# Altium PCB board.PcbDoc
Units mm, origin at the board's own origin, x right, y up, seen from the top; angles counter-clockwise.
Board outline 35 x 22.5 mm, 2 copper layers (Top Layer, Bottom Layer), stack 0.97 mm thick; 43 components, 27 nets, 165 pads, 122 vias.
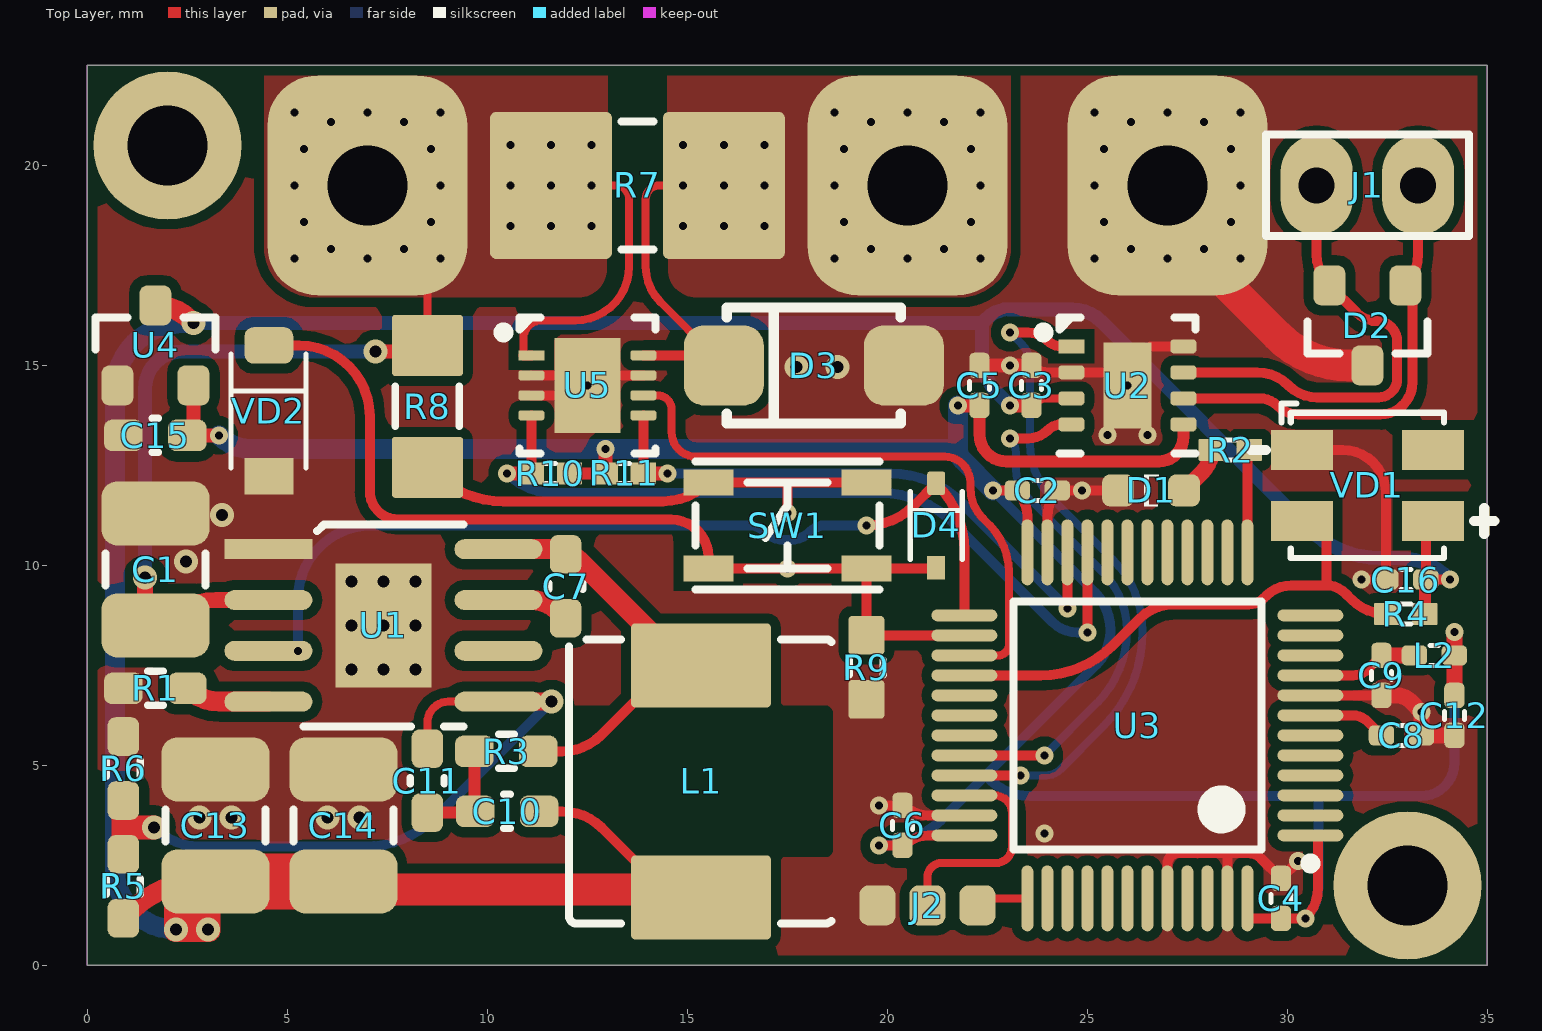
[diagram p0: Top Layer view]
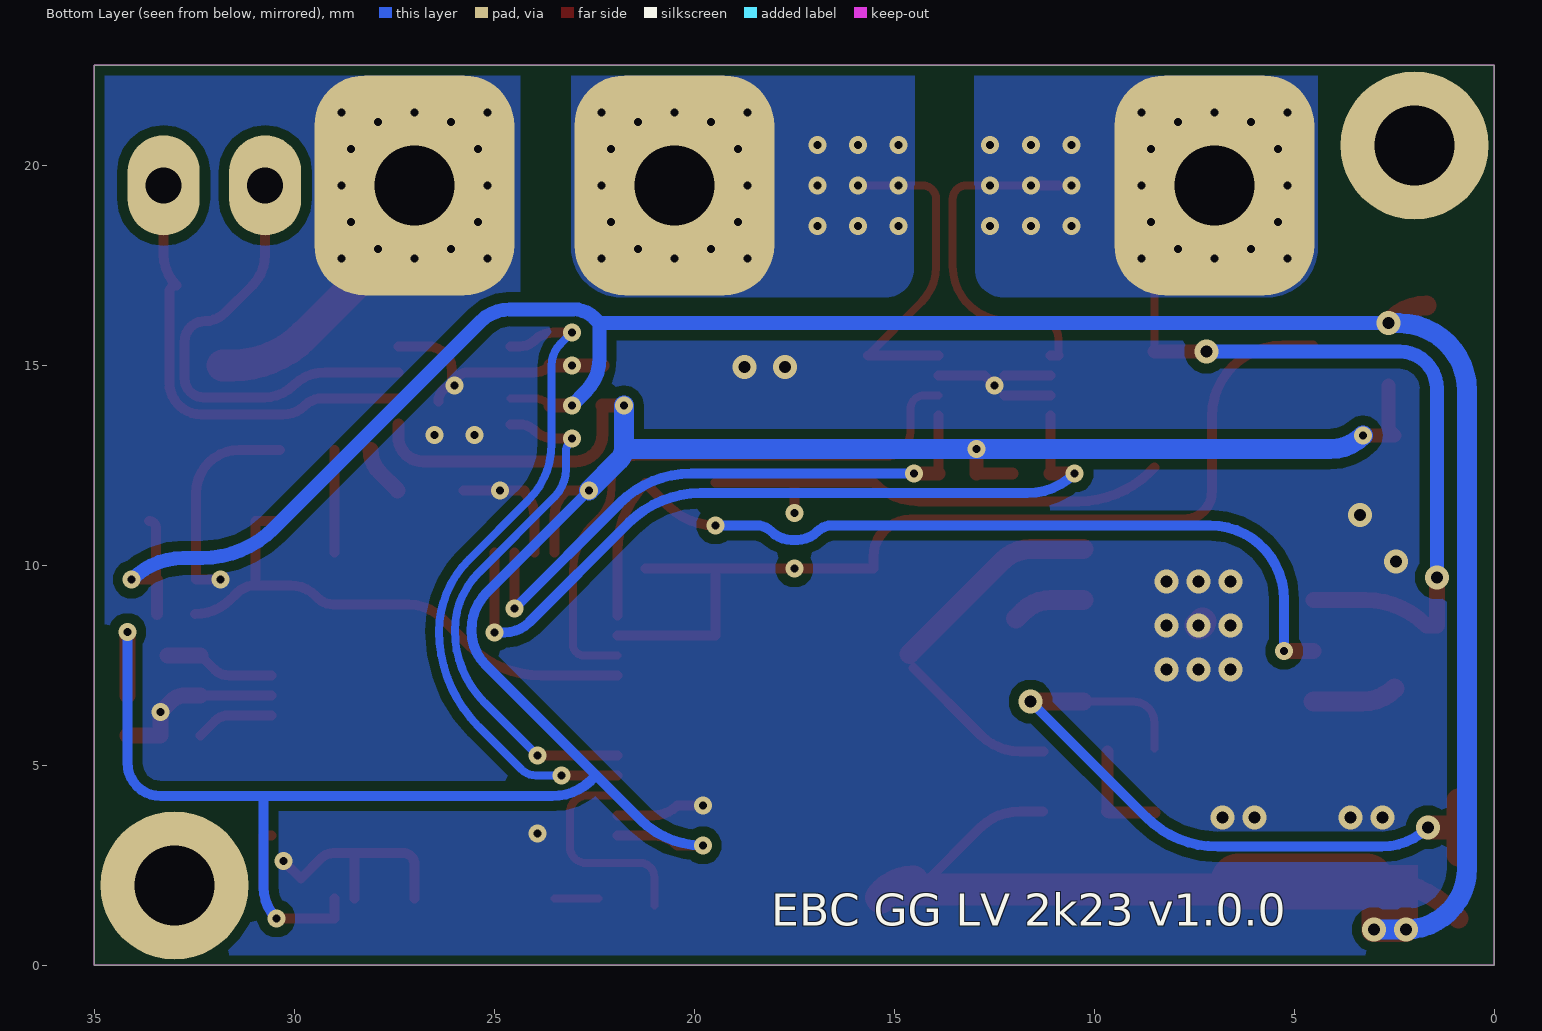
[diagram p1: Bottom Layer view, seen from below]
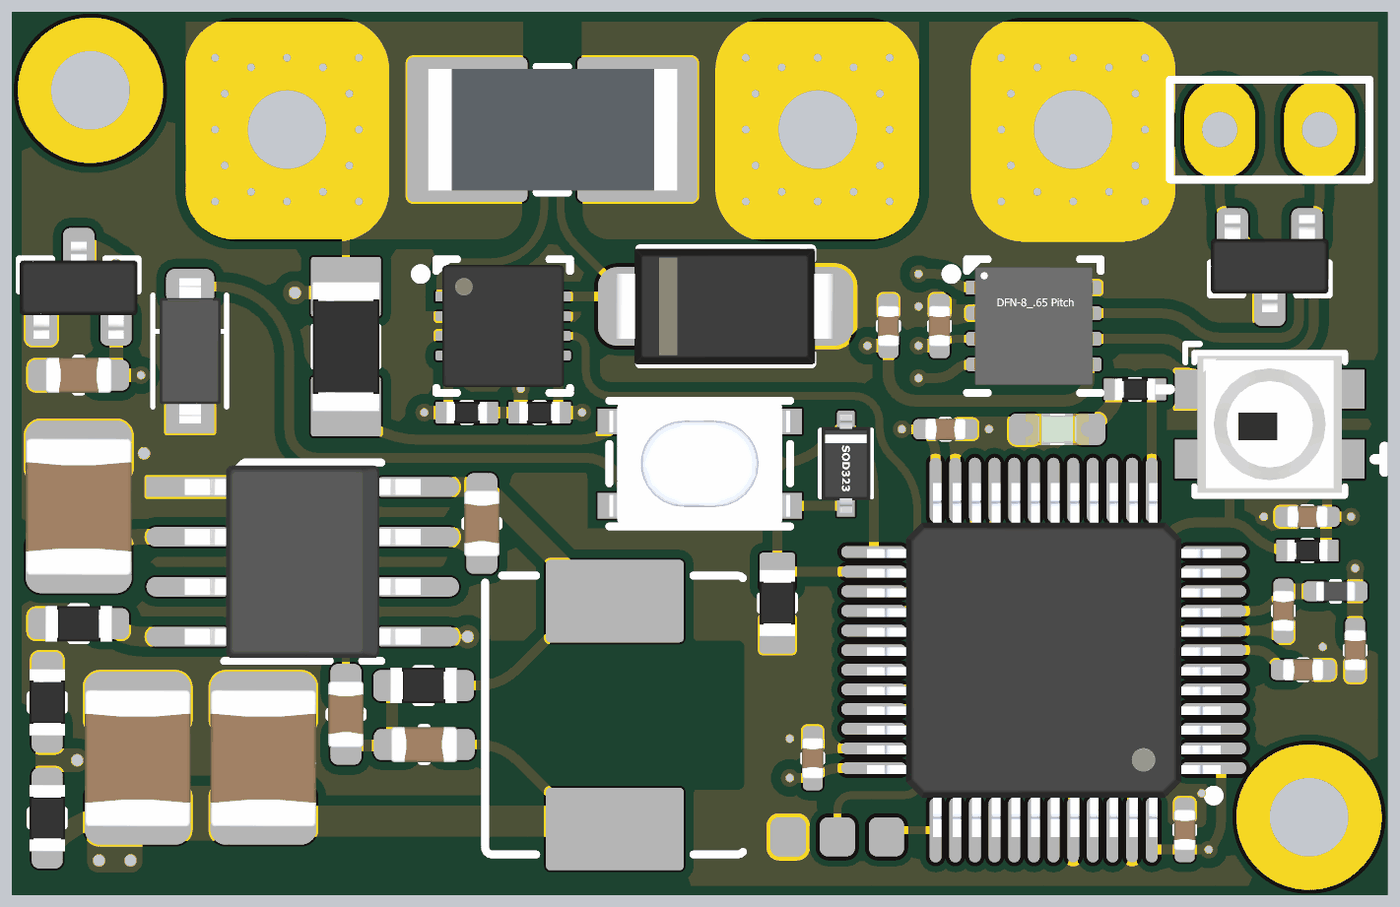
[diagram p2: 3D render of the assembled board from above, using the file's embedded part models]

## Layer stack, top to bottom
Top Solder: solder mask 0.0127, Solder Resist, Dk 3.8
Top Layer: signal copper 0.035
Dielectric: core 0.9, FR-4, Dk 4.5
Bottom Layer: signal copper 0.035
Bottom Solder: solder mask 0.0127, Solder Resist, Dk 3.8

## Board outline
0,0 0,22.5 35,22.5 35,0

## Design rules (kind name [scope] priority, off if disabled: settings)
AcuteAngle [All] p1: minimum=6.00000000000000E+0001 checktracksonly=FALSE
Clearance Clearance_1 [All] p1: gap=0.25 ignorepadtopadclearanceinfootprint=FALSE except(0.13: Arc-Arc Arc-Track Arc-SMDPad Arc-Via Track-Track Track-SMDPad Track-Via SMDPad-SMDPad SMDPad-Via THPad-Via Via-Via; 0.15: Arc-THPad Arc-Text Arc-Hole Track-THPad Track-Text Track-Hole SMDPad-THPad SMDPad-Text SMDPad-Hole THPad-THPad THPad-Text THPad-Hole Via-Text Via-Hole Fill-Text Fill-Hole Poly-Text Poly-Hole Region-Text Region-Hole Text-Text Text-Hole)
ComponentClearance ComponentClearance_1 [HasFootprint('HDR-1X2')] p1: gap=-1 collisioncheckmode=3 verticalgap=2540 showdistances=FALSE
ComponentClearance ComponentClearance_3 [HasFootprint('TP30_SMD')] p2: gap=-1 collisioncheckmode=3 verticalgap=2540 showdistances=FALSE
ComponentClearance ComponentClearance_4 [HasFootprint('HDR-1X3')] p3: gap=-1 collisioncheckmode=3 verticalgap=2540 showdistances=FALSE
ComponentClearance ComponentClearance_2 [HasFootprint('CONN_DG308-2.54-2P') vs HasFootprint('CONN_DG308-2.54-2P')] p4: gap=-1 collisioncheckmode=3 verticalgap=2540 showdistances=FALSE
ComponentClearance [All] p5: gap=0.3 collisioncheckmode=3 verticalgap=0.254 showdistances=FALSE
HoleSize [All] p1: absolutevalues=TRUE maxlimit=6 minlimit=0.2 maxpercent=80.000 minpercent=20.000
HoleToHoleClearance HoleToHoleClearance_1 [IsVia vs IsThruPin] p1: gap=0.7 allowstackedmicrovias=TRUE
HoleToHoleClearance [All] p2: gap=0.5 allowstackedmicrovias=TRUE
MinimumSolderMaskSliver [All] p1 off: minsoldermaskwidth=0.254
PlaneClearance [All] p1: clearance=0.45
PlaneConnect [All] p1: planeconnectstyle=Direct reliefexpansion=0.3 reliefentries=4 reliefconductorwidth=0.381 reliefairgap=0.178
PolygonConnect [All] p1: connectstyle=Direct reliefconductorwidth=0.381 reliefentries=4 polygonreliefangle="90 Angle" airgapwidth=0.356
RoutingVias [All] p1: holewidth=0.3 width=0.6 viastyle="Through Hole" minholewidth=0.2 minwidth=0.45 maxholewidth=0.9 maxwidth=1.27
SilkToSilkClearance [All] p1 off: silktosilkclearance=0.254
SilkToSolderMaskClearance [IsPad] p1 off: minsilkscreentomaskgap=0.254 clearancetoexposedcopper=TRUE
SolderMaskExpansion [All] p1: expansion=0.102 istentingtop=FALSE
UnRoutedNet [All] p1: checkbadconnections=TRUE
Width [All] p1: maxlimit=3.81 minlimit=0.14 preferedwidth=0.254
21 further rules are at their usual default settings.

## Components (designator, comment, footprint, x,y, rotation, side; value= is the part's Value field where it differs from the comment)
C1 "2u2" C1210 1.7,9.9 r270 top
C2 "100nF" C0402 23.75,11.875 r180 top
C3 "100nF" C0402 23.6,14.5 r270 top
C4 "100nF" C0402 29.839,1.675 r270 top
C5 "100nF" C0402 22.3,14.5 r270 top
C6 "100nF" C0402 20.375,3.5 r270 top
C7 "2.2nF" C0603 11.956,9.475 r90 top
C8 "100nF" C0402 32.85,5.75 r180 top
C9 "100nF" C0402 32.35,7.25 r90 top
C10 "22n" C0603 10.491,3.85 r0 top
C11 "56pF" C0603 8.5,4.619 r270 top
C12 "100nF" C0402 34.174,6.25 r90 top
C13 "22u" C1210 3.2,3.5 r270 top
C14 "22u" C1210 6.4,3.5 r270 top
C15 "10uF" C0603 1.7,13.25 r0 top
C16 "100nF" C0402 32.96,9.648 r0 top
D1 "GRN" LED-0603-GRN 26.593,11.875 r0 top
D2 "PESD2CAN" SOT-23 32,16 r90 top
D3 "58V" SMA 18.16,15 r180 top
D4 "1N4148WS" SOD-323 21.221,11 r270 top
J1 "CAN" HDR-1X2 32,19.5 r90 top
J2 "SWD" HDR-1x3-P1.25 21,1.5 r180 top
L1 "68uH" L0605-POWER 15.34,4.6 r90 top
L2 "BEAD" L0402 33.674,7.75 r180 top
R1 "100k" R0603#1 1.7,6.925 r180 top
R2 "470" R0402 28.574,12.89 r0 top
R3 "237k" R0603#1 10.475,5.35 r180 top
R4 "2k2" R0402 32.96,8.784 r0 top
R5 "18k" R0603#1 0.9,1.977 r90 top
R6 "101k" R0603#1 0.9,4.923 r90 top
R7 "2mR" R2512-WIDE 13.75,19.5 r180 top
R8 "470k" R1206 8.5,13.976 r270 top
R9 "18k" R0603#2 19.475,7.45 r90 top
R10 "2k2" R0402 11.576,12.3 r0 top
R11 "2k2" R0402 13.424,12.3 r180 top
SW1 "PTS810SJS250" BTN_PTS810 17.5,11 r180 top
U1 "LM5164" PowerSOIC-8 7.4,8.5 r270 top
U2 "SIT1042QTK/3" DFN8_3X3_P065 26,14.5 r0 top
U3 "STM32F103CBT6" LQFP-48 26.25,6 r180 top
U4 "XC6206P332MR" SOT-23 1.7,15.5 r270 top
U5 "LTC2944" DFN8_3X3_P05 12.5,14.5 r0 top
VD1 "WS2812B-MINI" LED-SMD_4P-L3.5-W3.5-TL_WS2812B 32,12 r180 top
VD2 "3V3" SOD-123 4.537,13.865 r270 top

## Footprints (in the part's own frame and the unit in brackets; to place one, negate y for a bottom-side part, rotate by r counter-clockwise, add the part's x,y. Pads: shape width x height; smd on the part's side, far side on the other; paste and mask are expansions set on the pad)
BTN_PTS810 [mm]
  rect 1.25x0.65 smd mask+0.05: 1(-1.975,1.075) 2(1.975,1.075) 3(-1.975,-1.075) 4(1.975,-1.075)
  silkscreen extent -2.3,-1.6 2.3,1.6, body extent -2.3,-1.6 2.3,1.6, height 2.5
C0402 [mm] "Chip Capacitor Body"
  rrect50% 0.635x0.508 smd mask+0.05: 1(-0.5,0) 2(0.5,0)
  silkscreen extent -0.1,-0.25 0.1,0.25, body extent -0.52,-0.27 0.53,0.28, height 0.55
C0603 [mil] "Chip Capacitor"
  rrect50% 38x31 smd mask+1.97: 1(-31.5,0) 2(31.5,0)
  silkscreen extent -3,-17 3,17, body extent -33,-18 33,18, height 35
C1210 [mm] "Chip Capacitor"
  rrect50% 1.6x2.7 smd mask+0.05: 1(-1.4,0) 2(1.4,0)
  silkscreen extent -0.4,-1.25 0.4,1.25, body extent -1.75,-1.35 1.75,1.35, height 1.8
DFN8_3X3_P05 [mm]
  rect 0.65x0.25 smd mask+0.05: 1(-1.4,0.75)
  rrect50% 0.65x0.25 smd mask+0.05: 2(-1.4,0.25) 3(-1.4,-0.25) 4(-1.4,-0.75) 5(1.4,-0.75) 6(1.4,-0.25) 7(1.4,0.25) 8(1.4,0.75)
  rect 1.65x2.38 smd mask+0.05: 9(0,0)
  silkscreen extent -2.22,-1.7 1.7,1.7, body extent -1.55,-1.55 1.55,1.55, height 0.8
DFN8_3X3_P065 [mm]
  rect 0.65x0.35 smd mask+0.05: 1(-1.4,0.975)
  rrect50% 0.65x0.35 smd mask+0.05: 2(-1.4,0.325) 3(-1.4,-0.325) 4(-1.4,-0.975) 5(1.4,-0.975) 6(1.4,-0.325) 7(1.4,0.325) 8(1.4,0.975)
  rect 1.2x2.15 smd mask+0.05: 9(0,0)
  silkscreen extent -2.22,-1.7 1.7,1.7, body extent -1.51,-1.5 1.51,1.5, height 0.8
HDR-1X2 [mm]
  oval 2.5x1.8 hole 0.9: 1(0,1.27) 2(0,-1.27)
  silkscreen extent -1.27,-2.54 1.27,2.54
HDR-1x3-P1.25 [mm]
  rrect50% 0.9x1 smd: 1(-1.25,0) 2(0,0) 3(1.25,0)
L0402 [mm] "Chip Inductor"
  rrect50% 0.635x0.508 smd mask+0.05: 1(-0.5,0) 2(0.5,0)
  silkscreen extent -0.1,-0.25 0.1,0.25, body extent -0.5,-0.25 0.5,0.25, height 0.5
L0605-POWER [mm]
  rrect10% 2.1x3.5 smd paste+0 mask+0.05: 1(2.9,0) 2(-2.9,0)
  Top Layer pour cut-out: -1.9,-3.122 -1.886,-3.19 -1.848,-3.248 -1.79,-3.286 -1.722,-3.3 -1.722,-3.3 1.722,-3.3 1.79,-3.286 1.848,-3.248 1.886,-3.19 1.9,-3.122 1.9,-3.122 1.9,3.122 1.886,3.19 1.848,3.248 1.79,3.286 1.722,3.3 1.722,3.3 -1.722,3.3 -1.79,3.286 -1.848,3.248 -1.886,3.19 -1.9,3.122 -1.9,3.122
  silkscreen extent -3.55,-3.26 3.55,3.3, body extent -3.55,-3.3 3.55,3.3, height 5
LED-0603-GRN [mm]
  rrect50% 0.8x0.8 smd mask+0.05: 1(0.825,0) 2(-0.825,0)
  silkscreen extent -0.18,-0.4 0.2,0.4, body extent -0.8,-0.4 0.8,0.4, height 0.6
LED-SMD_4P-L3.5-W3.5-TL_WS2812B [mm]
  rect 1.545x0.997 smd paste+0 mask+0.051: 1(-1.638,0.89) 2(-1.638,-0.89) 3(1.638,-0.89) 4(1.638,0.89)
  silkscreen extent -3.17,-2.04 2.92,1.82, body extent -1.84,-1.74 1.84,1.74, height 1.95
LQFP-48 [mm]
  oval 1.65x0.3 smd: 1(-4.325,2.75) 2(-4.325,2.25) 3(-4.325,1.75) 4(-4.325,1.25) 5(-4.325,0.75) 6(-4.325,0.25) 7(-4.325,-0.25) 8(-4.325,-0.75) 9(-4.325,-1.25) 10(-4.325,-1.75) 11(-4.325,-2.25) 12(-4.325,-2.75) 25(4.325,-2.75) 26(4.325,-2.25) 27(4.325,-1.75) 28(4.325,-1.25) 29(4.325,-0.75) 30(4.325,-0.25) 31(4.325,0.25) 32(4.325,0.75) 33(4.325,1.25) 34(4.325,1.75) 35(4.325,2.25) 36(4.325,2.75)
  oval 0.3x1.65 smd: 13(-2.75,-4.325) 14(-2.25,-4.325) 15(-1.75,-4.325) 16(-1.25,-4.325) 17(-0.75,-4.325) 18(-0.25,-4.325) 19(0.25,-4.325) 20(0.75,-4.325) 21(1.25,-4.325) 22(1.75,-4.325) 23(2.25,-4.325) 24(2.75,-4.325) 37(2.75,4.325) 38(2.25,4.325) 39(1.75,4.325) 40(1.25,4.325) 41(0.75,4.325) 42(0.25,4.325) 43(-0.25,4.325) 44(-0.75,4.325) 45(-1.25,4.325) 46(-1.75,4.325) 47(-2.25,4.325) 48(-2.75,4.325)
  silkscreen extent -4.45,-3.1 3.1,3.57, body extent -4.5,-4.5 4.5,4.5, height 1.5
PowerSOIC-8 [mm]
  rect 0.5x2.2 smd mask+0.05: 1(-1.905,-2.875)
  oval 0.5x2.2 smd mask+0.05: 2(-0.635,-2.875) 3(0.635,-2.875) 4(1.905,-2.875) 5(1.905,2.875) 6(0.635,2.875) 7(-0.635,2.875) 8(-1.905,2.875)
  rect 3.1x2.4 smd mask+0.05: 9(0,0)
  silkscreen extent -2.52,-2 2.52,2, body extent -2.45,-3 2.45,3, height 1.68
R0402 [mm]
  rrect10% 0.635x0.55 smd mask+0.05: 1(-0.476,0) 2(0.476,0)
  silkscreen extent -0.12,-0.25 0.13,0.25, body extent -0.52,-0.27 0.53,0.28, height 0.4
R0603#1 [mil] "Chip Resistor; Body 1.6 x 0.8 mm (LxW typ)"
  rrect50% 38x31 smd mask+1.97: 1(-31.5,0) 2(31.5,0)
  silkscreen extent -8,-17 8,17, body extent -33,-18 33,18, height 22
R0603#2 [mil] "Chip Resistor; Body 1.6 x 0.8 mm (LxW typ)"
  rrect20% 38x35.43 smd mask+1.97: 1(-31.5,0) 2(31.5,0)
  silkscreen extent -7,-17 7,17, body extent -33,-18 33,18, height 22
R1206 [mil] "Chip Resistor"
  rrect10% 60x70 smd mask+1.97: 1(-60,0) 2(60,0)
  silkscreen extent -20,-31 20,31, body extent -65,-33 65,33, height 26
R2512-WIDE [mm] "Chip Resistor; Body 6.4 x 3.2 mm (LxW typ)"
  rrect10% 3.05x3.68 smd mask+0.05: 1(-2.16,0) 2(2.16,0)
  silkscreen extent -0.4,-1.6 0.4,1.6, body extent -3.19,-1.55 3.16,1.55, height 0.55
SMA [mm] "SMA(DO-214AC)"
  rrect50% 2x2 smd: 1(-2.25,0) 2(2.25,0)
  silkscreen extent -2.17,-1.45 2.17,1.45, body extent -2.78,-1.48 2.83,1.48, height 2.9
SOD-123 [mm]
  rect 0.91x1.22 smd mask+0.05: 1(1.635,0)
  rrect50% 0.91x1.22 smd mask+0.05: 2(-1.635,0)
  silkscreen extent -1.43,-0.95 1.43,0.92, body extent -1.85,-0.77 1.85,0.77, height 1.44
SOD-323 [mm]
  rect 0.59x0.45 smd mask+0.05: 1(1.055,0)
  rrect30% 0.59x0.45 smd mask+0.05: 2(-1.055,0)
  silkscreen extent -0.85,-0.65 0.85,0.65, body extent -1.25,-0.63 1.25,0.62, height 0.99
SOT-23 [mm]
  rrect50% 1x0.8 smd mask+0.05: 1(1,-0.95) 2(1,0.95) 3(-1,0)
  silkscreen extent -0.7,-1.5 0.1,1.5, body extent -1.27,-1.5 1.33,1.5, height 1.1

## Part data
C1: library part CAP, "2.2uF 100V 1210"
C2 C3 C4 C5 C6 C8 C9 C12: library part CAP, "100nF 50V 0402"
C7: library part CAP, "2.2nF 50V 0603"
C10: library part CAP, "2.2nF 0603"
C11: library part CAP, "56pF 0603"
C13 C14: library part CAP, "22u 35V 1210"
C15: library part CAP, "10uf 50V 1206"
C16: library part CAP, "100nF 50V 0402", LCSC part number=C131394, P/N=CC0402KRX7R9BB104
D1: library part LED-0603-GREEN, "LED 0603 GRN"
D2: library part CDSOT23-SM712, LCSC part number=C5261081, P/N=PESD2CAN
D3: library part NCP51460SN33T1G, "SMAJ58A", LCSC part number=C693617, P/N=SMCJ24A
D4: library part US1M-13-F
J1: library part "Header 2"
J2: library part "Header 3"
L1: library part SRN3015-100M, "PSPMAA0605H-680M-IGF"
L2: library part BLM18AG601SN1D, "BEAD 0402"
R1: library part RES, "100k 0603"
R2 R4 R10 R11: library part RES
R3: library part RES, "237k 0603"
R5 R9: library part RES, "18k 0603"
R6: library part RES, "101k 0603"
R7: library part RES, "2mR shunt 2512", LCSC part number=C728320, P/N=PA2512FKF7T0R002E
R8: library part RES, "470k 1206"
SW1: library part Component_1
U2: library part LTC2875, "IC INTERFACE CAN"
U4: library part Component_4_1
U5: library part LTC2944IDD#TRPBF, "LTC2944IDD#TRPBF", LCSC part number=C683673, P/N=LTC2944IDD#TRPBF
VD1: LCSC part number=C527089, P/N=WS2812B-Mini
VD2: library part ZENER, "Zener 3.3V"

## Free pads (board coordinates)
  rrect50% 5x5.5 hole 2: *(7,19.5) *(20.5,19.5) *(27,19.5)
  round 3.7 hole 2: M(2,20.5) M(33,2)

## Via types
v1: diameter 0.45, hole 0.2, Top Layer to Bottom Layer, tented both sides, 96 vias
v2: diameter 0.6, hole 0.3, Top Layer to Bottom Layer, tented both sides, 24 vias
v3: diameter 0.45, hole 0.2, Top Layer to Bottom Layer, 2 vias

## Nets (pads, with @x,y where several pads share a name; then routed paths per layer and width w, separated by ;. In a path a pad name is that pad's centre, name@x,y a point inside that pad or via, vN(x,y) a via of type N, cw(c..) or ccw(c..) an arc to the next point about the centre after c; other vN are vias at no path point)
3V3: C2.2 C4.2 C5.2 C6.2 C12.2 C15.2 L2.1 R10.2 R11.2 U2.5 U3.1 U3.24 U3.36 U3.48 U4.2 | length 73.9
  Top Layer w0.25: v1(19.79,3) C6.2 20.425,3 cw(c21.029,2.396) 21.029,3.25 U3.36 ; v1(22.64,11.875) C2.2 ; C2.2@23.25,11.824 cw(c22.646,11.221) 23.5,11.221 U3.24 ; U3.48 29,1.175 C4.2 v1(30.449,1.175) ccw(c29.678,1.946) 30.768,1.946 30.768,3.25 U3.1
  Top Layer w0.3: R10.2 R11.2 ; C5.2 22.3,13.279 ccw(c22.979,13.279) 22.979,12.6 26.787,12.6 ccw(c26.787,13.213) 27.4,13.213 U2.5
  Top Layer w0.35: U4.2 2.65,13.4 C15.2 v1(3.286,13.25) ; R11.2 v1(12.948,12.908) ; v1(21.765,14) C5.2
  Top Layer w0.4: C12.2 L2.1 v1(34.174,8.335)
  Bottom Layer w0.25: v1(19.79,3) ccw(c19.79,5.213) 21.355,3.648 25.217,7.51 ccw(c24.35,8.378) 25.577,8.378 ccw(c24.222,8.378) 25.18,9.335 v1(22.64,11.875) ; 22.467,4.758 ccw(c23.559,5.629) 23.559,4.232 30.771,4.232 ; v1@30.449,1.175 ccw(c29.671,1.953) 30.771,1.953 30.771,4.232 ; v1(34.174,8.335) 34.174,5.065 cw(c33.341,5.065) 33.341,4.232 30.771,4.232
  Bottom Layer w0.5: v1(3.286,13.25) ccw(c4.112,14.076) 4.112,12.908 v1(12.948,12.908) 21.765,12.908 ; v1(21.765,14) 21.765,12.908 ; v1(22.64,11.875) 21.876,12.639 cw(c22.146,12.908) 21.765,12.908
5V: C3.2 C10.2 C13.2 C14.2 C16.2 L1.2 R4.2 R5.1 U2.3 U4.3 VD1.1 | length 80.3
  Top Layer w0.2: C3.2 cw(c24.022,13.578) 24.022,14.175 U2.3
  Top Layer w0.25: C10.2 11.866,3.85 cw(c11.866,2.438) 12.865,3.436 14.201,2.1 14.4,1.901 14.54,1.761 ccw(c14.899,2.121) 14.899,1.613 L1.2@14.933,1.613 ; VD1.1 ccw(c33.638,10.932) 33.46,10.932 C16.2 v1(34.069,9.648)
  Top Layer w0.3: R4.2 33.436,9.624 cw(c33.46,9.624) C16.2
  Top Layer w0.35: v1(23.065,14) C3.2
  Top Layer w0.5: R5.1 1.079,1.356 cw(c2.875,-0.44) 2.875,2.1 C13.2 ; U4.3 cw(c1.7,15.282) 2.562,16.143 v2(2.65,16.055)
  Top Layer w0.8: C14.2 6.599,1.901 14.4,1.901 L1.2@15.125,1.901 ; L1.2@14.529,2.1 cw(c14.529,1.109) L1.2@15.125,1.901 ; L1.2 L1.2@15.229,1.811 ; L1.2@15.125,1.901 cw(c14.529,1.109) L1.2@15.229,1.811 ; L1.2@15.125,1.901 15.138,1.901 L1.2@15.229,1.811
  Top Layer w1.4: C13.2 C14.2
  Bottom Layer w0.35: v2(2.65,16.055) 21.01,16.055 22.369,16.055 ; v1(23.065,14) 22.717,14.348 cw(c23.557,15.187) 22.369,15.187 22.369,16.055 ; v1(34.069,9.648) ccw(c32.775,8.353) 32.775,10.184 32.316,10.184 cw(c32.316,12.724) 30.519,10.928 25.348,16.099 ccw(c24.612,15.363) 24.612,16.404 23.037,16.404 ccw(c23.037,15.637) 22.494,16.179 22.369,16.055
  Bottom Layer w0.5: v2(2.65,16.055) 2.38,16.055 ccw(c2.38,14.359) 0.685,14.359 0.685,2.431 ccw(c2.216,2.431) v2(2.216,0.9) v2(3.016,0.9)
ALCC: U3.27 U5.6 | length 15.3
  Top Layer w0.2: U5.6 14.252,14.25 cw(c14.252,13.898) 14.604,13.898 14.604,13.331 ccw(c15.213,13.331) 15.213,12.721 21.425,12.721 cw(c21.425,12.075) 22.071,12.075 22.071,11.934 ccw(c23.136,11.934) 22.383,11.181 22.548,11.016 cw(c21.368,9.836) 23.037,9.836 23.037,8.022 cw(c22.765,8.022) 22.765,7.75 U3.27
B_SENS: D4.1 R9.2 SW1.1 SW1.2 U3.26 VD2.2 | length 24.9
  Top Layer w0.25: VD2.2 5.288,15.5 cw(c5.288,13.728) 7.06,13.728 7.06,11.857 ccw(c7.771,11.857) 7.771,11.146 14.594,11.146 cw(c14.594,10.215) 15.525,10.215 SW1.2 SW1.1 ; D4.1@21.221,9.925 SW1.1 ; U3.26 R9.2 SW1.1
  other v3: 17.5,9.925
CAN_H: D2.2 J1.1 U2.7 | length 11.6
  Top Layer w0.25: U2.7 29.241,14.825 cw(c29.241,13.712) 30.028,14.499 ccw(c30.744,15.215) 30.744,14.203 32.277,14.203 ccw(c32.277,14.671) 32.745,14.671 32.745,15.597 ccw(c32.235,15.597) 32.235,16.107 cw(c32.235,16.814) 31.736,16.314 D2.2 cw(c31.822,17.772) 30.73,17.772 J1.1
CAN_L: D2.1 J1.2 U2.6 | length 11.4
  Top Layer w0.25: U2.6 29.305,14.175 cw(c29.305,13.547) 29.749,13.991 ccw(c30.281,14.523) 30.281,13.771 32.317,13.771 ccw(c32.317,14.58) 33.127,14.58 33.127,16.823 ccw(c32.95,16.823) D2.1 ccw(c32.178,17.772) 33.27,17.772 J1.2
CAN_RX: U2.4 U3.32 | length 13.4
  Top Layer w0.25: U3.32 v1(23.925,5.25) v1@23.94,5.25 ; v1(23.065,13.175) 23.517,13.175 ccw(c23.517,13.858) 24,13.375 cw(c24.362,13.013) 24.362,13.525 U2.4
  Bottom Layer w0.2: v1(23.065,13.175) cw(c22.704,12.814) 23.214,12.814 23.214,12.398 ccw(c24.178,12.398) 23.497,11.717 25.388,9.826 ; v1(23.925,5.25) 25.247,6.572 ccw(c23.451,8.369) 25.991,8.369 ccw(c23.931,8.369) 25.389,9.825
CAN_TX: U2.1 U3.33 | length 16.8
  Top Layer w0.25: U3.33 v1(23.325,4.75) ; v1(23.065,15.825) 23.517,15.825 cw(c23.517,15.142) 24,15.625 ccw(c24.362,15.987) 24.362,15.475 U2.1
  Bottom Layer w0.2: v1(23.065,15.825) 23.344,15.546 cw(c22.797,15) 23.57,15 23.57,13.044 ccw(c25.577,13.044) 24.158,11.625 25.639,10.144 cw(c23.846,8.351) 26.381,8.351 cw(c23.014,8.351) 25.395,5.97 24.324,4.899 cw(c23.965,5.258) 23.965,4.75 v1(23.325,4.75)
EN_PWR: D4.2 U1.3 U3.25 | length 23.1
  Top Layer w0.25: v1(19.475,11) ccw(c19.475,12.667) 20.654,11.488 D4.2 cw(c19.52,10.354) 21.925,10.354 U3.25
  Top Layer w0.4: U1.3 v1(5.26,7.865)
  Bottom Layer w0.25: v1(5.26,7.865) 5.26,9.153 cw(c7.107,9.153) 7.107,11 16.563,11 cw(c16.563,10.493) 16.921,10.852 ccw(c17.429,11.36) 17.429,10.641 17.571,10.641 ccw(c17.571,11.36) 18.079,10.852 cw(c18.437,10.493) 18.437,11 v1(19.475,11)
GND: C1.1 C2.1 C3.1 C4.1 C5.1 C6.1 C8.1 C9.1 C12.1 C13.1 C14.1 C15.1 C16.1 D1.2 D2.3 D3.1 J2.3 pad.*@27,19.5 R1.2 R6.2 R9.1 U1.1 U1.9 U2.2 U2.8 U2.9 U3.8 U3.23 U3.35 U3.44 U3.47 U4.1 U5.2 U5.3 U5.7 U5.9 VD1.3 VD2.1 | length 39.1
  Top Layer w0.25: U5.3 U5.9@12.25,14.25 ; U5.2 U5.9@12.25,14.75 ; v1(12.5,14.5) 12.75,14.75 U5.7 ; v1(19.79,4) C6.1 20.425,4 ccw(c21.029,4.604) 21.029,3.75 U3.35 ; C3.1 ccw(c24.022,15.422) 24.022,14.825 U2.2 25.675,14.825 cw(c25.675,14.5) v1(26,14.5) ; U3.23 24,11.221 cw(c24.854,11.221) C2.1@24.25,11.824 ; C2.1 v1(24.86,11.875) D1.2 ; U2.9@26.4,14.1 ccw(c26,14.1) v1(26,14.5) ; U3.44 27,2.529 cw(c27.279,2.529) 27.279,2.808 28.5,2.808 ; U2.8 26.668,15.475 ccw(c26.668,14.868) 26.061,14.868 26.061,14.561 cw(c26,14.561) v1(26,14.5) ; U3.47 28.5,2.808 ; 29.333,2.681 C4.1 v1(30.27,2.606) ; 29.333,2.681 ccw(c29.026,2.374) 29.026,2.808 28.5,2.808 ; VD1.3 31.376,12.89 cw(c31.376,11.806) 32.46,11.806 C16.1 v1(31.85,9.648) ; U3.8 C9.1
  Top Layer w0.35: C5.1 v1(23.065,15) C3.1
  Top Layer w0.4: C9.1 32.724,6.75 cw(c32.724,6.242) 33.083,6.601 v1(33.35,6.335) C8.1 C12.1
  Top Layer w0.7: U1.9@7.3,8.6 ccw(c7.4,8.6) v2(7.4,8.5)
  Top Layer w0.8: pad.*@26,19.5 29.756,15.744 ccw(c31.552,17.54) 31.552,15 D2.3@31.8,15
  other v1: 23.925,3.298 25.5,13.254 26.5,13.254 25.171,17.671 27,17.671 28.829,17.671 26.086,17.916 27.914,17.916 25.416,18.586 28.584,18.586 25.171,19.5 28.829,19.5 25.416,20.414 28.584,20.414 26.086,21.084 27.914,21.084 25.171,21.329 27,21.329 28.829,21.329
  other v2: 2.8,3.7 3.6,3.7 6,3.7 6.8,3.7 6.6,7.4 7.4,7.4 8.2,7.4 6.6,8.5 8.2,8.5 6.6,9.6 7.4,9.6 8.2,9.6 2.462,10.1 3.361,11.262 17.733,14.962 18.749,14.962
NetC7_1: C7.1 U1.7 | length 1.8
  Top Layer w0.5: U1.7 11.086,9.135 cw(c11.086,8.144) 11.787,8.845 C7.1
NetC7_2: C7.2 L1.1 R3.1 U1.8 | length 9.4
  Top Layer w0.25: R3.1 11.863,5.35 ccw(c11.863,6.732) 12.84,5.755 L1.1@14.524,7.439
  Top Layer w0.5: U1.8 11.598,10.405 cw(c11.598,9.414) 12.299,10.115 L1.1@14.623,7.79
NetC8_2: C8.2 U3.7 | length 2
  Top Layer w0.25: U3.7 31.64,6.25 cw(c31.64,5.742) 31.999,6.101 C8.2
NetC9_2: C9.2 L2.2 U3.9 | length 2.8
  Top Layer w0.25: U3.9 31.64,7.25 ccw(c31.64,7.758) 31.999,7.399 C9.2
  Top Layer w0.4: C9.2 L2.2
NetC10_1: C10.1 C11.2 R3.2 | length 2.7
  Top Layer w0.3: C11.2 9.606,3.819 ccw(c9.606,3.888) C10.1@9.675,3.888 ; R3.2 C10.1@9.675,3.888 ; C10.1 cw(c9.729,3.888) C10.1@9.675,3.888
NetC11_1: C11.1 R5.2 R6.1 U1.5 | length 17.6
  Top Layer w0.2: C11.1 8.5,6.068 cw(c9.027,6.068) 9.027,6.595 U1.5
  Top Layer w0.45: U1.5 v2(11.596,6.595)
  Top Layer w0.6: R5.2 R6.1 ; 0.9,3.45 v2(1.662,3.45)
  Bottom Layer w0.25: v2(1.662,3.45) ccw(c2.827,4.615) 2.827,2.967 6.916,2.967 ccw(c6.916,5.507) 8.712,3.711 v2(11.596,6.595)
NetD1_1: D1.1 R2.1 | length 1.3
  Top Layer w0.4: D1.1 27.861,12.319 ccw(c27.29,12.89) R2.1
NetR1_1: R1.1 U1.4 | length 2.1
  Top Layer w0.5: R1.1 ccw(c3.297,7.722) 3.297,6.595 U1.4
NetR2_2: R2.2 U3.13 | length 2.6
  Top Layer w0.25: U3.13 R2.2@29,12.89
NetR8_2: R8.2 SW1.3 SW1.4 | length 12.1
  Top Layer w0.25: R8.2 8.605,12.347 ccw(c10.401,14.143) 10.401,11.603 14.386,11.603 ccw(c14.386,13.214) SW1.4 17.5,12.075 ; v3(17.5,11.313) 17.5,12.075 ; SW1.3 17.5,12.075
SCL: R10.1 U3.21 U5.4 | length 20
  Top Layer w0.25: R10.1 U5.4 ; v1@25,8.31 v1(25,8.325) U3.21
  Top Layer w0.35: v1(10.492,12.3) R10.1
  Bottom Layer w0.25: v1(10.492,12.3) ccw(c11.683,13.492) 11.683,11.807 19.851,11.807 cw(c19.851,9.267) 21.647,11.063 24.129,8.581 ccw(c24.746,9.198) 24.746,8.325 v1(25,8.325)
SDA: R11.1 U3.22 U5.5 | length 14.7
  Top Layer w0.25: R11.1 U5.5 ; v1(24.5,8.925) U3.22
  Top Layer w0.35: R11.1 v1(14.508,12.3)
  Bottom Layer w0.25: v1(14.508,12.3) 20.073,12.3 cw(c20.073,9.76) 21.869,11.556 v1(24.5,8.925)
SER_LED: R4.1 U3.28 VD1.4 | length 13.7
  Top Layer w0.25: U3.28 23.829,7.25 ccw(c23.829,9.79) 25.625,7.994 26.3,8.669 cw(c27.154,7.815) 27.154,9.023 29.022,9.023 ccw(c29.022,9.579) 29.415,9.186 29.465,9.235 cw(c30.104,8.597) 30.104,9.5 30.978,9.5 ; VD1.4 30.978,11.11 30.978,9.5 ; R4.1 cw(c32.484,10.033) 31.6,9.15 31.443,9.307 ccw(c30.978,8.841) 30.978,9.5
SWCLK: J2.1 U3.37 | length 1.1
  Top Layer w0.2: J2.1@22.402,1.675 U3.37
SWDIO: J2.2 U3.34 | length 5.5
  Top Layer w0.2: J2.2 21,2.201 cw(c21.36,2.201) 21.36,2.561 22.712,2.561 ccw(c22.712,2.962) 23.113,2.962 23.113,3.816 ccw(c22.678,3.816) 22.678,4.25 U3.34
Vb+: D3.2 pad.*@20.5,19.5 R7.1 U5.8 | length 8.5
  Top Layer w0.2: D3.2@15.66,15.25 14.319,16.591 cw(c15.192,17.463) 13.958,17.463 13.958,19.159 cw(c14.299,19.159) 14.299,19.5 v1(15.91,19.5)
  Top Layer w0.25: U5.8 D3.2@15.66,15.25
  other v1: 18.671,17.671 20.5,17.671 22.329,17.671 19.586,17.916 21.414,17.916 14.894,18.484 15.91,18.484 16.926,18.484 18.916,18.586 22.084,18.586 14.894,19.5 16.926,19.5 18.671,19.5 22.329,19.5 18.916,20.414 22.084,20.414 14.894,20.516 15.91,20.516 16.926,20.516 19.586,21.084 21.414,21.084 18.671,21.329 20.5,21.329 22.329,21.329
Vout: C1.2 pad.*@7,19.5 R7.2 R8.1 U1.2 U5.1 | length 30.4
  Top Layer w0.2: pad.*@7,19.5 cw(c7,18) 8.5,18 R8.1 ; U5.1@10.901,15.25 10.901,15.676 cw(c11.347,15.676) 11.347,16.123 12.189,16.123 ccw(c12.189,17.476) 13.542,17.476 13.542,19.159 ccw(c13.201,19.159) 13.201,19.5 v1(11.59,19.5)
  Top Layer w0.25: R7.2@10.9,19.5 v1(11.59,19.5) ; U5.1@10.901,15.25 U5.1
  Top Layer w0.35: v2(7.199,15.348) R8.1@8.5,15.348
  Top Layer w0.4: v2(1.44,9.702) 1.44,8.5 C1.2 cw(c3.233,6.967) 1.702,8.502 cw(c3.233,6.967) 3.233,9.135 U1.2
  Bottom Layer w0.35: v2(1.44,9.702) 1.44,14.416 cw(c2.372,14.416) 2.372,15.348 v2(7.199,15.348)
  other v1: 5.171,17.671 7,17.671 8.829,17.671 6.086,17.916 7.914,17.916 10.574,18.484 11.59,18.484 12.606,18.484 5.416,18.586 8.584,18.586 5.171,19.5 8.829,19.5 10.574,19.5 12.606,19.5 5.416,20.414 8.584,20.414 10.574,20.516 11.59,20.516 12.606,20.516 6.086,21.084 7.914,21.084 5.171,21.329 7,21.329 8.829,21.329
pads on no net: U1.6 U3.2 U3.3 U3.4 U3.5 U3.6 U3.10 U3.11 U3.12 U3.14 U3.15 U3.16 U3.17 U3.18 U3.19 U3.20 U3.29 U3.30 U3.31 U3.38 U3.39 U3.40 U3.41 U3.42 U3.43 U3.45 U3.46 VD1.2

## Polygon pours and split planes (outlines as drawn)
GND on Top Layer "NONET_L02_P-001" (solid, remove dead copper, pour order 5): 0,22.5 0,0 35,0 35,22.5
Vb+ on Top Layer "NONET_L02_P-001" (solid, remove dead copper, pour order 4): 14.522,19.503 14.522,17.395 ccw(c15.208,17.395) 15.208,16.709 21.837,16.709 ccw(c21.837,17.953) 23.082,17.953 23.082,23.237 14.496,23.237 14.496,19.503
Vout on Top Layer "NONET_L02_P-001" (solid, remove dead copper, pour order 3): 12.978,19.503 12.978,17.395 cw(c12.292,17.395) 12.292,16.709 5.663,16.709 cw(c5.663,17.953) 4.418,17.953 4.418,23.237 13.004,23.237 13.004,19.503
GND on Bottom Layer "NONET_L02_P-001" (solid, remove dead copper, pour order 6): 0,22.5 0,0 35,0 35,22.5
Vb+ on Bottom Layer "NONET_L02_P-001" (solid, remove dead copper, pour order 8): 14.522,19.503 14.522,17.395 ccw(c15.208,17.395) 15.208,16.709 21.837,16.709 ccw(c21.837,17.953) 23.082,17.953 23.082,23.237 14.496,23.237 14.496,19.503
Vout on Bottom Layer "NONET_L02_P-001" (solid, remove dead copper, pour order 7): 12.978,19.503 12.978,17.395 cw(c12.292,17.395) 12.292,16.709 5.663,16.709 cw(c5.663,17.953) 4.418,17.953 4.418,23.237 13.004,23.237 13.004,19.503

## Keep-outs
Keep-Out Layer:
  the board outline again, w0

## Other copper
Top Layer:
  region net 5V: 1.916,0.881 ccw(c2.207,0.881) 2.207,0.59 3.034,0.59 ccw(c3.034,0.878) 3.323,0.878 3.323,2.5 1.916,2.5
Bottom Layer:
  pour cut-out: 23.164,22.5 23.164,16.429 24.357,16.429 24.357,22.5

## Silkscreen, mask and mechanical layers (free items; w line width, h text height)
Bottom Overlay:
  text "EBC GG LV 2k23 v1.0.0" at 18.085,0.991 h0.8